# Altium PCB PCB1.PcbDoc
Units mil, origin at the board's own origin, x right, y up, seen from the top; angles counter-clockwise.
Board outline 4028 x 3940 mil, 2 copper layers (Top Layer, Bottom Layer); 72 components, 54 nets, 230 pads, 31 vias.
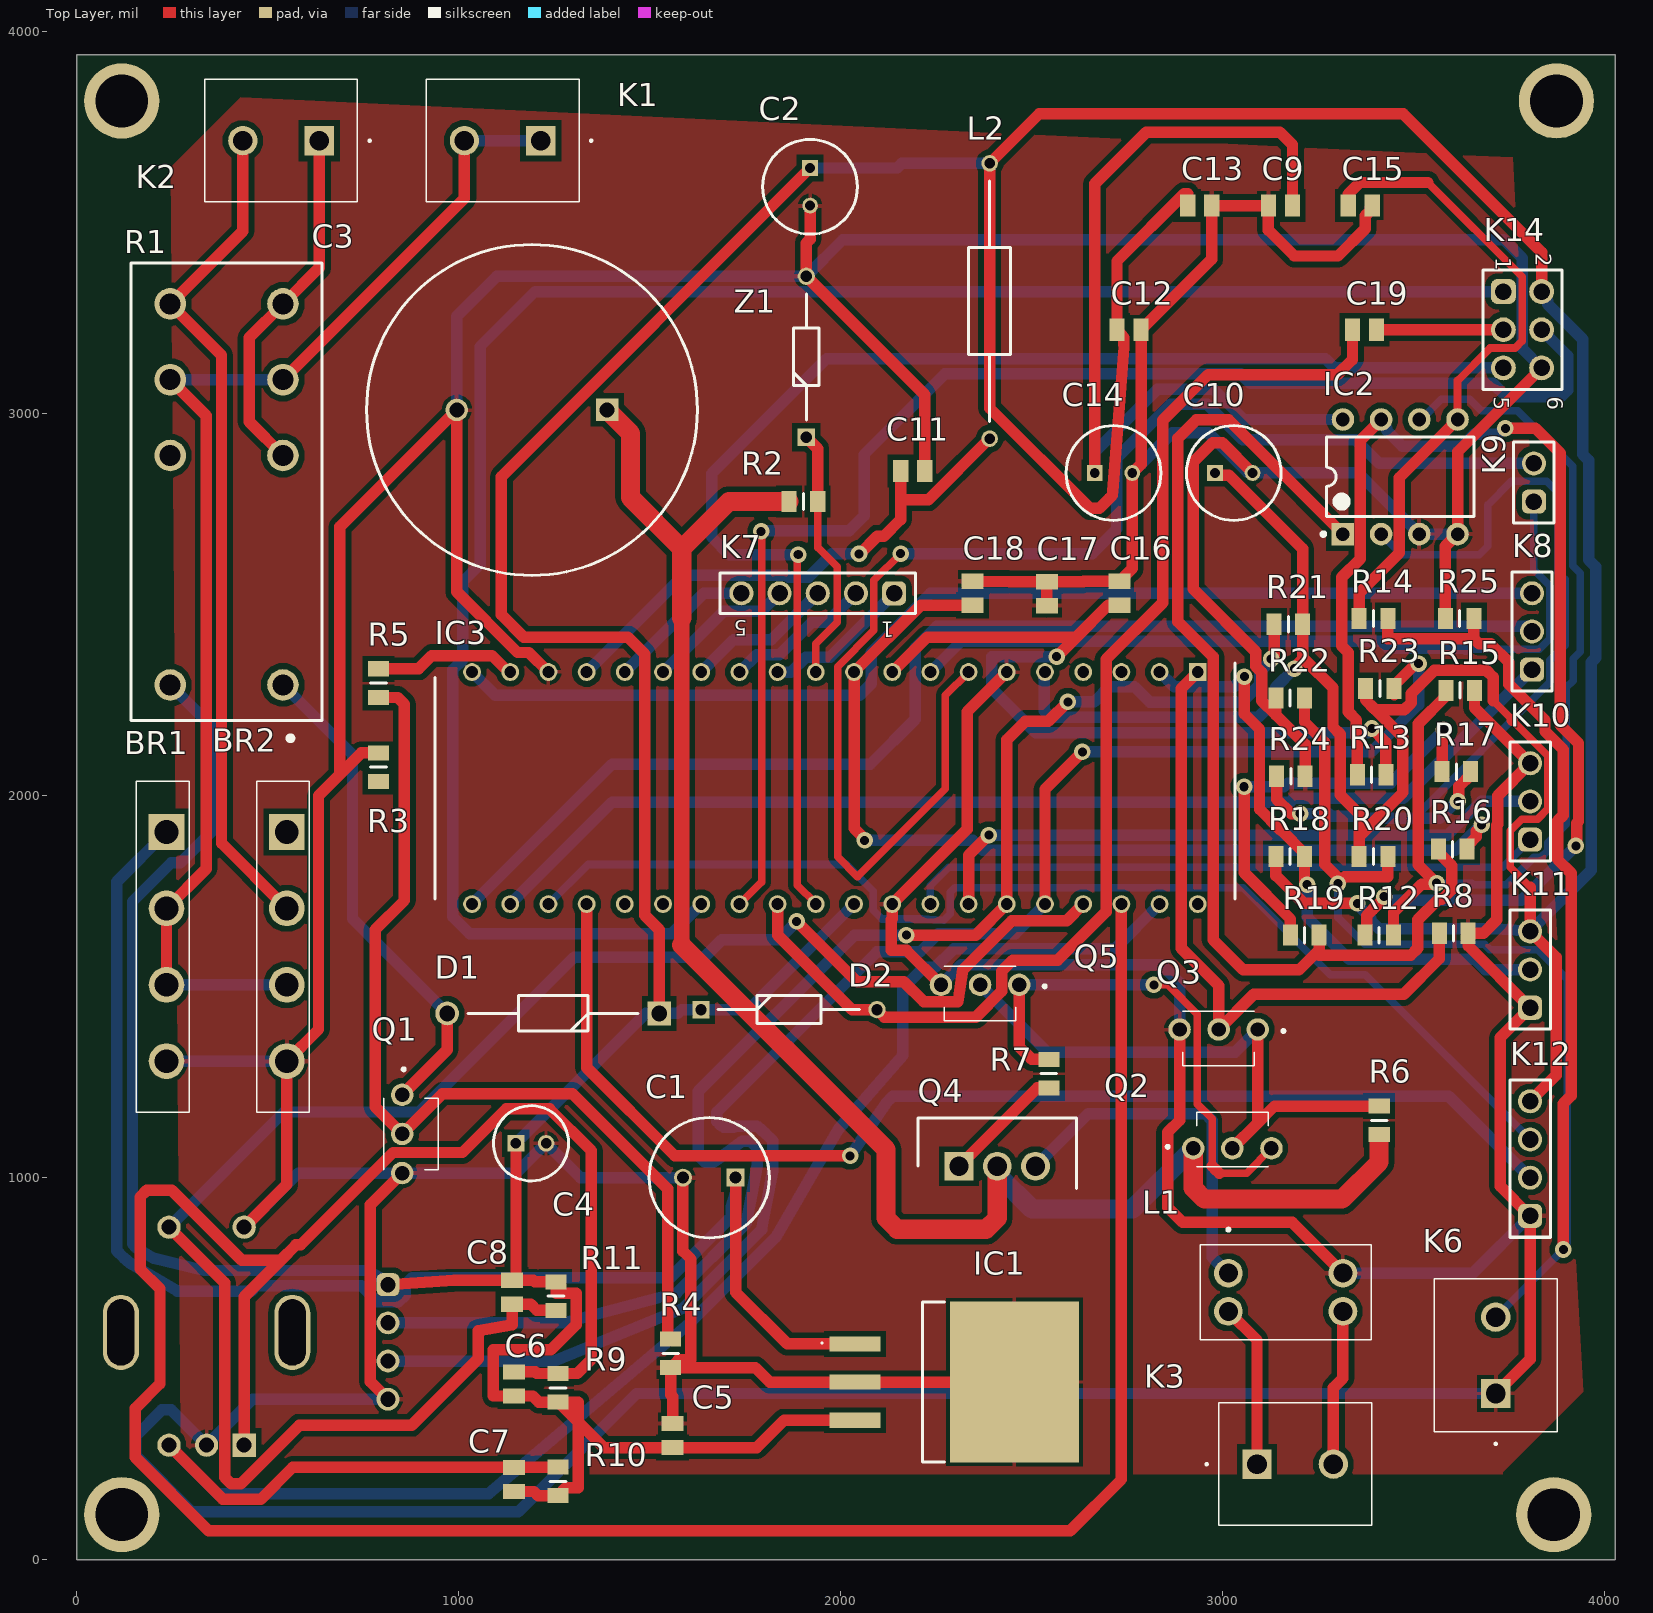
[diagram p0: Top Layer view]
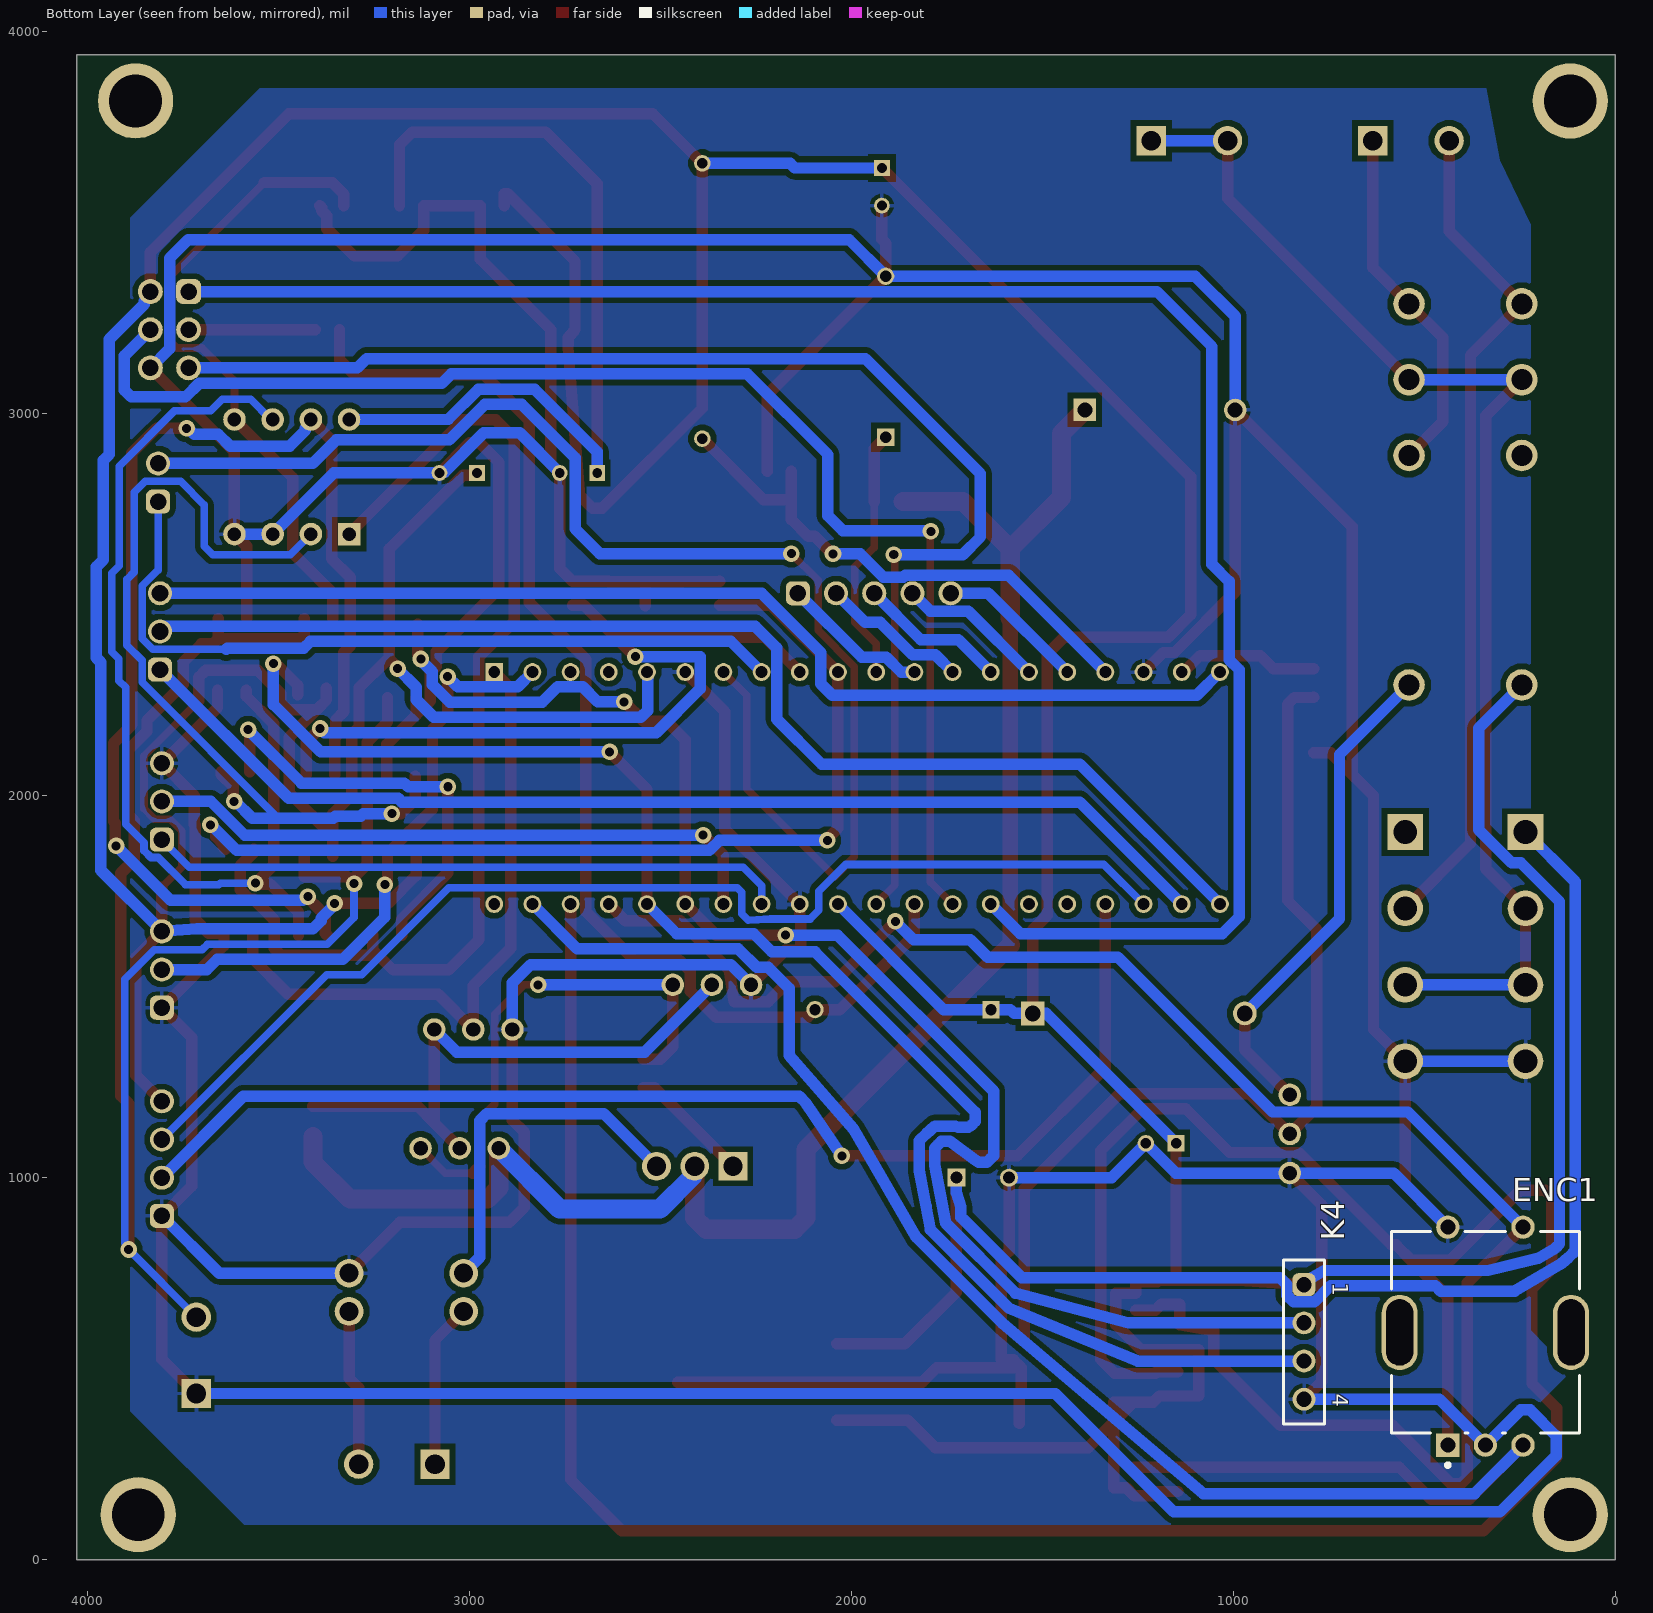
[diagram p1: Bottom Layer view, seen from below]
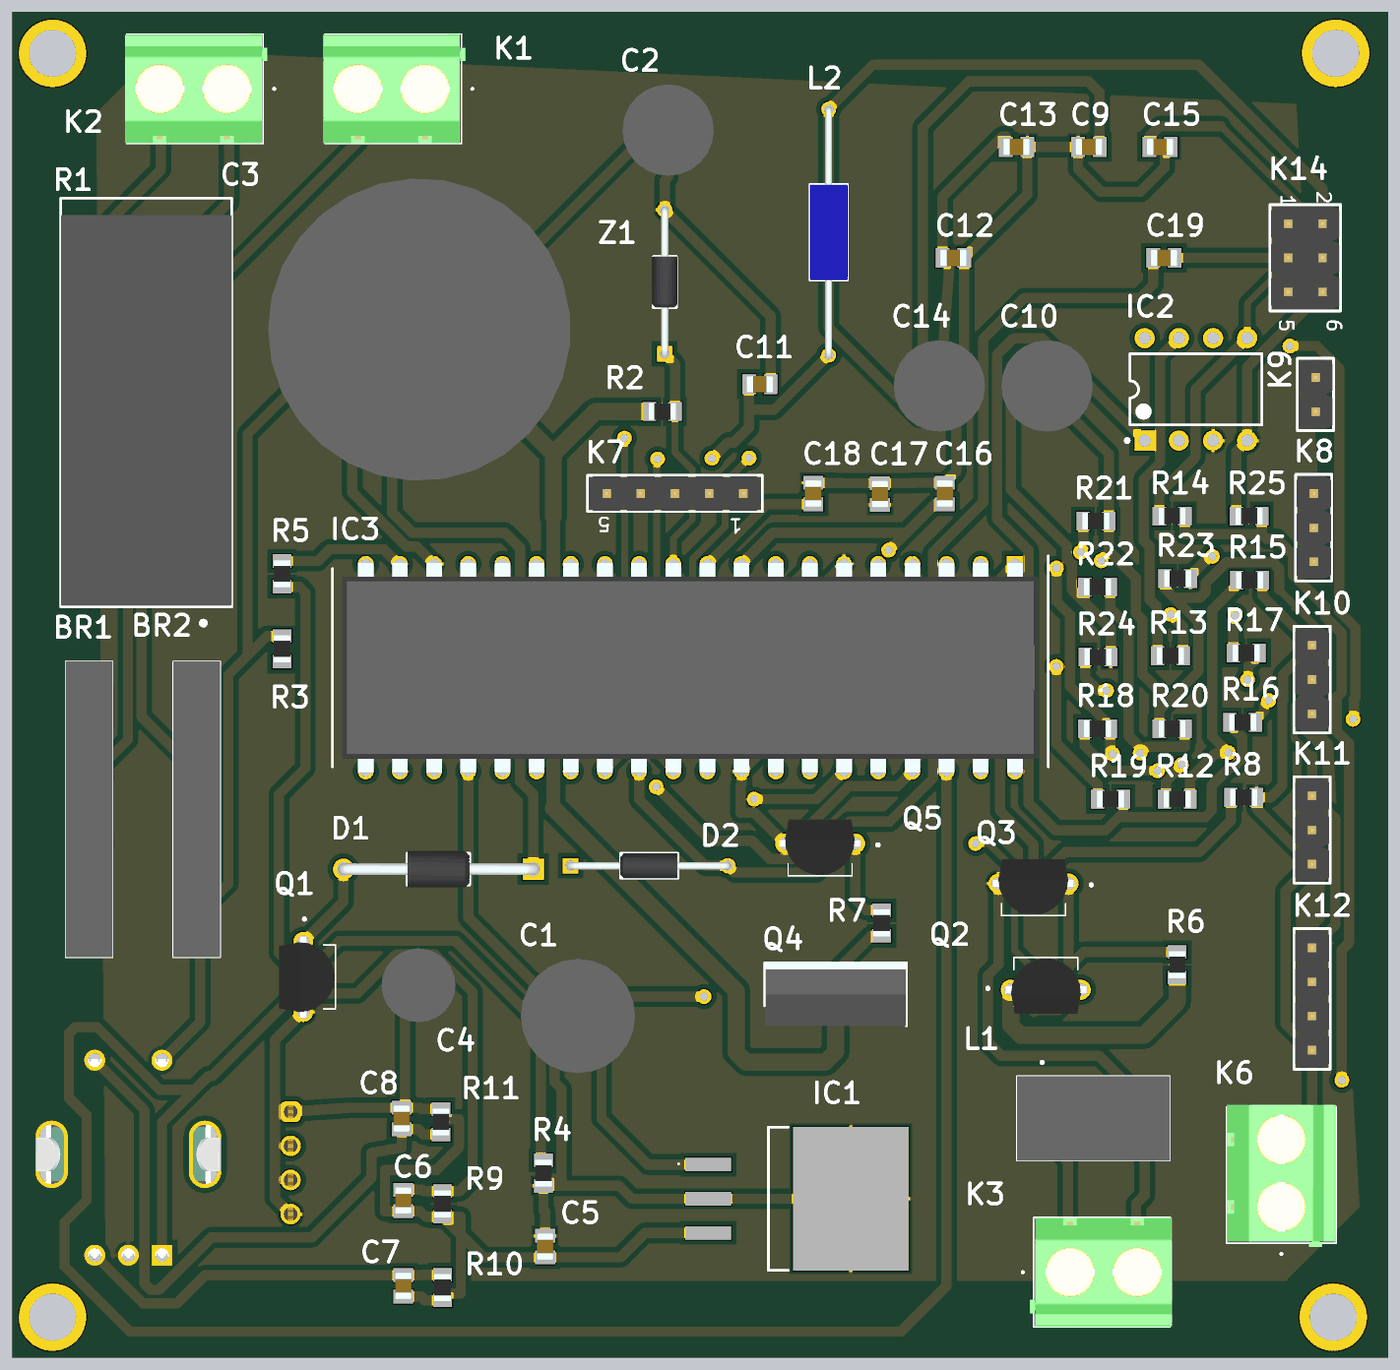
[diagram p2: 3D render of the assembled board from above, using the file's embedded part models]

## Layer stack, top to bottom
Top Solder: solder mask 0.4, Solder Resist, Dk 3.5
Top Layer: signal copper 1.4
Dielectric 1: dielectric 12.6, FR-4, Dk 4.8
Bottom Layer: signal copper 1.4
Bottom Solder: solder mask 0.4, Solder Resist, Dk 3.5

## Board outline
0,0 4028,0 4028,3940 0,3940

## Design rules (kind name [scope] priority, off if disabled: settings)
Clearance Clearance_4 [InNamedPolygon('GND_L02_P002')] p1: gap=15 ignorepadtopadclearanceinfootprint=FALSE
Clearance Clearance_3 [InNamedPolygon('GND_L01_P000')] p2: gap=15 ignorepadtopadclearanceinfootprint=FALSE
Clearance Clearance_2 [InNamedPolygon('GND_L01_P004')] p3: gap=20 ignorepadtopadclearanceinfootprint=FALSE
Clearance Clearance_1 [InNamedPolygon('GND_L02_P002')] p4: gap=20 ignorepadtopadclearanceinfootprint=FALSE
Clearance [All] p5: gap=0.25 ignorepadtopadclearanceinfootprint=FALSE except(0: Arc-Hole Track-Hole SMDPad-Hole THPad-Hole Via-Hole Fill-Hole Poly-Hole Region-Hole Text-Hole; 10: Arc-Arc Arc-Track Arc-SMDPad Track-Track Track-SMDPad SMDPad-SMDPad)
HoleSize [All] p1: absolutevalues=TRUE maxlimit=200 minlimit=1 maxpercent=80.000 minpercent=20.000
PolygonConnect [All] p1: connectstyle=Relief reliefconductorwidth=10 reliefentries=4 polygonreliefangle="90 Angle" airgapwidth=10
RoutingVias [All] p1: holewidth=23.62 width=43.31 viastyle="Through Hole" minholewidth=23.62 minwidth=43.31 maxholewidth=23.62 maxwidth=43.31
SolderMaskExpansion [All] p1: expansion=4 istentingtop=FALSE
Width [All] p1: maxlimit=50 minlimit=20 preferedwidth=20 minimp=50.000000 maximp=50.000000 favimp=50.000000
29 further rules are at their usual default settings.

## Classes and differential pairs
component class VoedingSCH: BR1 BR2 C1 C2 C3 D1 IC1 K1 K2 Q1 R1 R2 R3 R4 R5 Z1
component class Soldeerboute: K3 L1 Q2 Q3 Q4 Q5 R6 R7 R8
component class MainBoard: C9 C10 C11 C12 C13 C14 C15 C16 C17 C18 C19 D2 IC2 IC3 K6 K7 K8 K9 K10 K11 K12 K14 L2 R12 R13 R14 R15 R16 R17 R18 R19 R20 R21 R22 R23 R24 R25
component class Display: C4 C5 C6 C7 C8 ENC1 K4 R9 R10 R11

## Components (designator, comment, footprint, x,y, rotation, side; value= is the part's Value field where it differs from the comment)
BR1 "GBU6J" GBU6J 235,1905 r90 top
BR2 "GBU6J" GBU6J 550,1905 r90 top
C1 "100uF" CAPPRD350W60D800H1250 1725,1000 r180 top
C2 "10uF" CAPPRD250W45D630H850 1920,3643.43 r270 top
C3 "4700 uF" CAPPRD1000W80D2200H3700 1388.7,3010 r180 top
C4 "0.1 uF capaciteit" CAPPRD200W52D500H1250 1150,1090 r0 top
C5 "100n" CAPC2012X88N 1560,325 r90 top
C6 "10n" CAPC2012X88N 1145,460 r270 top
C7 "10n" CAPC2012X88N 1145,210 r270 top
C8 "10n" CAPC2012X88N 1140,700 r90 top
C9 "100n" CAPC2012X88N 3151.5,3545 r180 top
C10 "10uF" CAPPRD250W45D630H850 2980,2845 r0 top
C11 "100n" CAPC2012X88N 2188.5,2850 r180 top
C12 "100n" CAPC2012X88N 2755,3220 r180 top
C13 "100n" CAPC2012X88N 2940,3545 r180 top
C14 "10uF" CAPPRD250W45D630H850 2665,2845 r0 top
C15 "10n" CAPC2012X88N 3360,3545 r180 top
C16 "10n" CAPC2012X88N 2730,2530 r270 top
C17 "10n" CAPC2012X88N 2540,2528.5 r270 top
C18 "10n" CAPC2012X88N 2345,2530 r270 top
C19 "100n" CAPC2012X88N 3371.5,3220 r180 top
D1 "1N4007-T" DIOAD1408W86L464D236 1525,1430 r180 top
D2 "1N4148" DIOAD1165W56L425D185 1634.37,1440 r0 top
ENC1 "PEC11R-4215F-S0024" FP-PEC11R-4215F-S0024-MFG 340,595 r180 bottom
IC1 "R-78B5.0-1.5L" TL78005CKTTR 2303.23,465 r270 top
IC2 "MCP6002-E/P" PDIP300-P8 3465,2835 r90 top
IC3 "ATMEGA4809-PF" DIP1543W58P254L5175H635Q40N 1985,2020 r270 top
K1 "printkroonconnector" 1729128 1215,3715 r180 top
K2 "printkroonconnector" 1729128 635,3715 r180 top
K3 "printkroonconnector" 1729128 3090,250 r0 top
K4 "61300411821" 61300411821 815,570 r270 bottom
K6 "printkroonconnector" 1729128 3715,435 r90 top
K7 "61300511121" 61300511121 1940,2530 r180 top
K8 "61300311121" 61300311121 3810,2430 r90 top
K9 "61300211121" 61300211121 3815,2820 r90 top
K10 "61300311121" 61300311121 3805,1985 r90 top
K11 "61300311121" 61300311121 3805,1545 r90 top
K12 "61300411121" 61300411121 3805,1050 r90 top
K14 "61300621121" 61300621121 3785,3220 r270 top
L1 "CM2545X171B-10" CM2545X171B10 3015,750 r270 top
L2 "10uH" INDAD1827W51L711D279 2390,2935 r90 top
Q1 "BC547BTF" BC33740TA 875,1150 r270 top
Q2 "BC547BTF" BC33740TA 2990,1100 r0 top
Q3 "BC547BTF" BC33740TA 3025,1365 r180 top
Q4 "IRF9Z34NPBF" TO254P469X1042X1967-3P 2310,1030 r0 top
Q5 "BC547BTF" BC33740TA 2400.43,1481.97 r180 top
R1 "RT424005" RT42 392.36,2290 r90 top
R2 "68K" RESC2012X65N 1902.6,2770 r180 top
R3 "10K" RESC2012X65N 790,2075 r270 top
R4 "4k7" RESC2012X65N 1555,540 r90 top
R5 "10K" RESC2012X65N 790,2295 r270 top
R6 "4k7" RESC2012X65N 3410,1150 r270 top
R7 "100" RESC2012X65N 2545,1272.4 r270 top
R8 "4k7" RESC2012X65N 3605,1640 r0 top
R9 "10K" RESC2012X65N 1260,450 r270 top
R10 "10K" RESC2012X65N 1260,205 r270 top
R11 "10K" RESC2012X65N 1255,690 r90 top
R12 "18k" RESC2012X65N 3410,1635 r180 top
R13 "5k6" RESC2012X65N 3390,2055 r180 top
R14 "5k6" RESC2012X65N 3395,2464 r180 top
R15 "100" RESC2012X65N 3622,2276 r180 top
R16 "5K6" RESC2012X65N 3602,1860 r180 top
R17 "18k" RESC2012X65N 3612,2063 r0 top
R18 "4k7" RESC2012X65N 3177,1841 r0 top
R19 "18k" RESC2012X65N 3215,1635 r0 top
R20 "1M" RESC2012X65N 3395,1841 r0 top
R21 "4k7" RESC2012X65N 3172,2449 r180 top
R22 "5k6" RESC2012X65N 3177,2256 r180 top
R23 "4k7" RESC2012X65N 3411.6,2281 r0 top
R24 "100" RESC2012X65N 3178.6,2051 r180 top
R25 "10M" RESC2012X65N 3620.4,2464 r180 top
Z1 "5V1" DIOAD1068W53L380D172 1910,2938.74 r90 top

## Footprints (in the part's own frame and the unit in brackets; to place one, negate y for a bottom-side part, rotate by r counter-clockwise, add the part's x,y. Pads: shape width x height; smd on the part's side, far side on the other; paste and mask are expansions set on the pad)
1729128 [mm]
  rect 1.95x1.95 hole 1.3: 1(0,0)
  round 1.95 hole 1.3: 2(5.08,0)
  silkscreen extent -3.4,-4.08 7.62,4.08, body extent -2.82,-4.05 7.74,4.05, height 10.32
61300211121 [mm] "Pin Header, pitch 2.54 mm, THT, Vertical, single row, 2p"
  rrect50% 1.6x1.6 hole 1.1: 1(-1.27,0)
  round 1.6 hole 1.1: 2(1.27,0)
  silkscreen extent -2.69,-1.34 2.69,1.34, body extent -2.54,-1.27 2.54,1.27, height 8.57
61300311121 [mm] "Pin Header, pitch 2.54 mm, THT, Vertical, single row, 3p"
  rrect50% 1.6x1.6 hole 1.1: 1(-2.54,0)
  round 1.6 hole 1.1: 2(0,0) 3(2.54,0)
  silkscreen extent -3.96,-1.34 3.96,1.34, body extent -3.81,-1.27 3.81,1.27, height 8.57
61300411121 [mm] "Pin Header, pitch 2.54 mm, THT, Vertical, single row, 4p"
  rrect50% 1.6x1.6 hole 1.1: 1(-3.81,0)
  round 1.6 hole 1.1: 2(-1.27,0) 3(1.27,0) 4(3.81,0)
  silkscreen extent -5.23,-1.34 5.23,1.34, body extent -5.08,-1.27 5.08,1.27, height 8.57
61300411821 [mm] "Socket Header, Pitch 2.54 mm, THT, Vertical, single row, 4p"
  rrect50% 1.52x1.52 hole 1.02: 1(-3.81,0)
  round 1.52 hole 1.02: 2(-1.27,0) 3(1.27,0) 4(3.81,0)
  silkscreen extent -5.46,-1.35 5.46,1.35, body extent -5.33,-1.25 5.33,1.25, height 8.55
61300511121 [mm] "Pin Header, pitch 2.54 mm, THT, Vertical, single row, 5p"
  rrect50% 1.6x1.6 hole 1.1: 1(-5.08,0)
  round 1.6 hole 1.1: 2(-2.54,0) 3(0,0) 4(2.54,0) 5(5.08,0)
  silkscreen extent -6.5,-1.34 6.5,1.34, body extent -6.35,-1.27 6.35,1.27, height 8.57
61300621121 [mm] "Pin Header, pitch 2.54 mm, THT, Vertical, dual row, 6p"
  rrect50% 1.65x1.65 hole 1.1: 1(-2.54,-1.27)
  round 1.65 hole 1.1: 2(-2.54,1.27) 3(0,-1.27) 4(0,1.27) 5(2.54,-1.27) 6(2.54,1.27)
  silkscreen extent -3.96,-2.61 3.96,2.61, body extent -3.81,-2.54 3.81,2.54, height 8.59
BC33740TA [mm]
  round 1.493 hole 0.96: 1(-1.7,-0.585) 2(0.9,-0.585) 3(3.5,-0.585)
  silkscreen extent -3.5,-1.81 3.28,1.81, body extent -2.16,-2.38 4,1.75, height 8.67
CAPC2012X88N [mm]
  rect 1.02x1.47 smd: 1(-0.8,0) 2(0.8,0)
  body extent -1,-0.63 1,0.63, height 0.88
CAPPRD200W52D500H1250 [mm]
  rect 1.1x1.1 hole 0.7: 1(0,0)
  round 1.1 hole 0.7: 2(2,0)
  silkscreen extent -1.5,-2.5 3.5,2.5, body extent -1.75,-2.75 3.75,2.75, height 12.5
CAPPRD250W45D630H850 [mm]
  rect 1.05x1.05 hole 0.65: 1(0,0)
  round 1.05 hole 0.65: 2(2.5,0)
  silkscreen extent -1.9,-3.15 4.4,3.15, body extent -2.15,-3.4 4.65,3.4, height 8.5
CAPPRD350W60D800H1250 [mm]
  rect 1.2x1.2 hole 0.8: 1(0,0)
  round 1.2 hole 0.8: 2(3.5,0)
  silkscreen extent -2.25,-4 5.75,4, body extent -2.5,-4.25 6,4.25, height 12.5
CAPPRD1000W80D2200H3700 [mm]
  rect 1.5x1.5 hole 1: 1(0,0)
  round 1.5 hole 1: 2(10,0)
  silkscreen extent -6,-11 16,11, body extent -6.25,-11.25 16.25,11.25, height 37
CM2545X171B10 [mil]
  round 75 hole 50: 1(0,0) 2(100,0) 3(100,300) 4(0,300)
  silkscreen extent -118,-74 174,374, body extent -74,-74 174,374, height 378
DIOAD1068W53L380D172 [mm]
  rect 1.15x1.15 hole 0.75: 1(0,0)
  round 1.15 hole 0.75: 2(10.7,0)
  silkscreen extent 1.14,-0.86 9.52,0.86, body extent -0.26,-0.95 10.95,0.95, height 1.9
DIOAD1165W56L425D185 [mm]
  rect 1.15x1.15 hole 0.75: 1(0,0)
  round 1.15 hole 0.75: 2(11.7,0)
  silkscreen extent 1.14,-0.93 10.54,0.93, body extent -0.28,-0.92 11.93,0.92, height 1.84
DIOAD1408W86L464D236 [mm]
  rect 1.575x1.575 hole 1.05: 1(0,0)
  round 1.575 hole 1.05: 2(14.1,0)
  silkscreen extent 1.4,-1.18 12.7,1.18, body extent -0.43,-1.36 14.51,1.36, height 2.71
DIP1543W58P254L5175H635Q40N [mm]
  rect 1.184x1.184 hole 0.784: 1(-7.715,24.13)
  round 1.184 hole 0.784: 2(-7.715,21.59) 3(-7.715,19.05) 4(-7.715,16.51) 5(-7.715,13.97) 6(-7.715,11.43) 7(-7.715,8.89) 8(-7.715,6.35) 9(-7.715,3.81) 10(-7.715,1.27) 11(-7.715,-1.27) 12(-7.715,-3.81) 13(-7.715,-6.35) 14(-7.715,-8.89) 15(-7.715,-11.43) 16(-7.715,-13.97) 17(-7.715,-16.51) 18(-7.715,-19.05) 19(-7.715,-21.59) 20(-7.715,-24.13) 21(7.715,-24.13) 22(7.715,-21.59) 23(7.715,-19.05) 24(7.715,-16.51) 25(7.715,-13.97) 26(7.715,-11.43) 27(7.715,-8.89) 28(7.715,-6.35) 29(7.715,-3.81) 30(7.715,-1.27) 31(7.715,1.27) 32(7.715,3.81) 33(7.715,6.35) 34(7.715,8.89) 35(7.715,11.43) 36(7.715,13.97) 37(7.715,16.51) 38(7.715,19.05) 39(7.715,21.59) 40(7.715,24.13)
  silkscreen extent -8.31,-26.61 7.37,26.61, body extent -7.86,-25.88 7.86,25.88, height 6.35
FP-PEC11R-4215F-S0024-MFG [mm]
  round 1.55 hole 1 paste-1000 mask+0: 1(-2.5,7) 2(2.5,7) B(2.5,-7.5) C(0,-7.5)
  rrect100% 2.4x5 hole 4.4 slot 1.8 at 0 deg paste-1000 mask+0: 3(-5.7,0) 4(5.7,0)
  rect 1.55x1.55 hole 1 paste-1000 mask+0: A(-2.5,-7.5)
  silkscreen extent -6.25,-8.95 6.25,6.7, body extent -6.9,-7.8 6.9,7.12, height 21.5
GBU6J [mm]
  rect 2.37x2.37 hole 1.58: 1(0,0)
  round 2.37 hole 1.58: 2(-5.08,0) 3(-10.16,0) 4(-15.24,0)
  silkscreen extent -18.62,-1.5 3.38,2, body extent -18.62,-1.5 3.38,2, height 18.9
INDAD1827W51L711D279 [mm]
  round 1.1 hole 0.7: 1(0,0) 2(18.3,0)
  silkscreen extent 1.14,-1.4 17.14,1.4, body extent -0.25,-1.39 18.53,1.39, height 2.78
PDIP300-P8 [mm] "8-Pin Plastic Dual In-Line Package (PDIP)"
  rect 1.5x1.5 hole 0.9: 1(-3.81,3.81)
  round 1.5 hole 0.9: 2(-3.81,1.27) 3(-3.81,-1.27) 4(-3.81,-3.81) 5(3.81,-3.81) 6(3.81,-1.27) 7(3.81,1.27) 8(3.81,3.81)
  silkscreen extent -3.93,-4.9 2.65,5.23, body extent -3.55,-4.9 3.55,4.9, height 4.32
RESC2012X65N [mm]
  rect 1x1.4 smd: 1(-0.95,0) 2(0.95,0)
  silkscreen extent 0,-0.53 0,0.53, body extent -1,-0.63 1,0.63, height 0.65
RT42 [mm]
  round 2.1 hole 1.4: 1(0,-3.75) 2(15.26,-3.75) 3(20.3,-3.75) 4(25.34,-3.75) 5(25.34,3.75) 6(20.3,3.75) 7(15.26,3.75) 8(0,3.75)
  silkscreen extent -3.67,-6.35 28.07,6.35, body extent -2.21,-6.35 26.79,6.35, height 15.86
TL78005CKTTR [mm]
  rect 1x3.4 smd: 1(-2.54,-6.745) 2(0,-6.745) 3(2.54,-6.745)
  rect 10.7x8.6 smd: 4(0,3.855)
  silkscreen extent -5.33,-9 5.33,-0.8
TO254P469X1042X1967-3P [mm]
  rect 1.92x1.92 hole 1.28: 1(0,0)
  round 1.92 hole 1.28: 2(2.54,0) 3(5.08,0)
  silkscreen extent -2.73,-1.49 7.81,3.2, body extent -2.67,-1.5 7.75,3.19, height 18.84

## Part data
BR1 BR2: "Bridge Rectifier", Manufacturer_Name="GeneSiC Semiconductor", Datasheet Link=https://www.diodemodule.com/silicon_products/bridge_rectifiers/gbu6j.pdf, Height=18.8mm, Manufacturer_Part_Number=GBU6J
C1: library part ESK107M050AG3EA, "Capacitor Polarised", Manufacturer_Name=Kemet, Height=12.5mm, Manufacturer_Part_Number=ESK107M050AG3EA
C2 C10 C14: library part "10uF Capaciteit", "Capacitor Polarised", Manufacturer_Name=Kemet, Manufacturer_Part_Number=ESS106M050AE2AA, Datasheet Link=https://content.kemet.com/datasheets/KEM_A4057_ESS.pdf, Height=8.5mm
C3: library part "4700 uF capaciteit", "Capacitor Polarised", Manufacturer_Name=Kemet, Manufacturer_Part_Number=ESK478M050AQ3AA, Mouser2 Part Number=80-ESK478M050AQ3AA, Datasheet Link=https://componentsearchengine.com//ESK478M050AQ3AA.pdf, Height=37mm, Mouser2 Price/Stock=https://www.mouser.com/Search/Refine.aspx?Keyword=80-ESK478M050AQ3AA
C4: "Capacitor Polarised", Manufacturer_Name="Wurth Elektronik", Manufacturer_Part_Number=860010672001, Datasheet Link=http://katalog.we-online.com/pbs/datasheet/860010672001.pdf, Height=12.5mm
C5 C6 C7 C8: library part C0805C103K5RACTU, "Capacitor", Manufacturer_Name=Kemet, Datasheet Link=https://ms.componentsearchengine.com/Datasheets/2/C0805C103K5RACTU.pdf, Height=0.88mm, Manufacturer_Part_Number=C0805C103K5RACTU
C9 C11 C12 C13 C15 C16 C17 C18 C19: library part "0805 SMD capaciteit", "Capacitor", Manufacturer_Name=Kemet, Manufacturer_Part_Number=C0805C103K5RACTU, Datasheet Link=https://ms.componentsearchengine.com/Datasheets/2/C0805C103K5RACTU.pdf, Height=0.88mm
D1: "Diode", Manufacturer_Name=Rectron, Mouser2 Part Number=583-1N4007-T, Datasheet Link=https://componentsearchengine.com//1N4007-T.pdf, Manufacturer_Part_Number=1N4007-T, Mouser2 Price/Stock=https://www.mouser.com/Search/Refine.aspx?Keyword=583-1N4007-T
D2: "Diode", Manufacturer_Name=Nexperia, Datasheet Link=https://datasheet.datasheetarchive.com/originals/distributors/Datasheets-112/DSAP0040891.pdf, Manufacturer_Part_Number=1N4148
ENC1: library part CMP-1747-00012-2, "ROTARY ENCODER MECHANICAL 24PPR", Max Operating Temperature=70°C, Min Operating Temperature=-30°C, Package Quantity=150, Built in Switch=Yes, Detent=Yes, Encoder Type=Mechanical, Height=13.4mm, Hole Diameter=1.8mm, Length=21.5mm, Mount="Through Hole", Number of Channels=2, Orientation=Vertical, Output Type=Quadrature, Packaging=Bulk, Pulses per Revolution=24, Radiation Hardening=No, REACH SVHC="No SVHC", RoHS Compliant=Yes, Series=PEC11R, Termination="PC Pins", Type=Mechanical, Width=12.5mm
IC1: library part TL780-05CKTTR, "Integrated Circuit", Manufacturer_Name="Texas Instruments", Datasheet Link=http://www.ti.com/general/docs/suppproductinfo.tsp?distId=26&gotoUrl=http%3A%2F%2Fwww.ti.com%2Flit%2Fgpn%2Ftl780, Height=5.08mm, Manufacturer_Part_Number=TL780-05CKTTR
IC2: library part CMP-0187-00133-3, "None", Case/Package=PDIP, Input Bias Current=1pA, Input Offset Voltage (Vos)=4.5mV, Max Operating Temperature=125°C, Max Supply Voltage=6V, Min Operating Temperature=-40°C, Min Supply Voltage=1.8V, Nominal Supply Current=100uA, Operating Supply Voltage=5.5V, Output Current=23mA, Package Quantity=60, Power Supply Rejection Ratio (PSRR)=86dB, Voltage Gain=112dB, Amplifier Type="GENERAL PURPOSE", Bandwidth=1MHz, Common Mode Rejection Ratio=60dB, Gain Bandwidth Product=1MHz, Height=3.3mm, Input Offset Voltage-Max=4.5mV, Lead Free="Lead Free", Length=9.27mm, Mount="Through Hole", Number of Amplifiers=2, Number of Channels=2, Number of Circuits=2, Number of Elements=2, Number of Pins=8, Operating Supply Current=100uA, Output Current per Channel=23mA, Packaging=Rail/Tube, Radiation Hardening=No, REACH SVHC="No SVHC", RoHS Compliant=Yes, Slew Rate=0.6V/µs, Slew Rate-Nom=0.6V/µs, Supply Current=100uA, Technology=CMOS, Unity Gain Bandwidth Product=1MHz, Width=6.35mm
IC3: "Integrated Circuit", Manufacturer_Name=Microchip, Mouser2 Part Number=556-ATMEGA4809-PF, Datasheet Link=https://componentsearchengine.com//ATMEGA4809-PF.pdf, Height=6.35mm, Manufacturer_Part_Number=ATMEGA4809-PF, Mouser2 Price/Stock=https://www.mouser.com/Search/Refine.aspx?Keyword=556-ATMEGA4809-PF
K1 K2 K3 K6: "Connector", Manufacturer_Name="Phoenix Contact", Manufacturer_Part_Number=1729128, Datasheet Link=http://www.phoenixcontact.com/de/produkte/1729128/pdf, Height=10.15mm
K4: "WR-PHD Socket Header, THT, pitch 2.54mm, Single Row, Vertical, 4p", Contact Resistance=20mOhm, Manufacturer="Wurth Elektronik", Operating Temperature="-40 to +125degC", Rated Current=3A, Withstanding Voltage=500VAC, Working Voltage=250VAC, ComponentLink1Description=Manufacturer, ComponentLink1URL=http://www.we-online.de, ComponentLink2Description=Datasheet, ComponentLink2URL=https://www.we-online.com/catalog/datasheet/61300411821.pdf, Gender="Socket Header", Manufacturer Part Number=61300411821, Mounting Technology=THT, Orientation=Vertical, Packaging=Tray, Pin Number=4, Pitch=2.54mm, Row Number=Single
K7: "WR-PHD Pin Header, THT, pitch 2.54mm, Single Row, Vertical, 5p", Contact Resistance=20mOhm, Manufacturer="Wurth Elektronik", Operating Temperature="-40 to +105degC", Rated Current=3A, Withstanding Voltage=500VAC, Working Voltage=250VAC, ComponentLink1Description=Manufacturer, ComponentLink1URL=http://www.we-online.de, ComponentLink2Description=Datasheet, ComponentLink2URL=https://www.we-online.com/catalog/datasheet/61300511121.pdf, Gender="Pin Header", Manufacturer Part Number=61300511121, Mounting Technology=THT, Orientation=Vertical, Packaging=Bag, Pin Number=5, Pitch=2.54mm, Row Number=Single
K8 K10 K11: "WR-PHD Pin Header, THT, pitch 2.54mm, Single Row, Vertical, 3p", Contact Resistance=20mOhm, Manufacturer="Wurth Elektronik", Operating Temperature="-40 to +105degC", Rated Current=3A, Withstanding Voltage=500VAC, Working Voltage=250VAC, ComponentLink1Description=Manufacturer, ComponentLink1URL=http://www.we-online.de, ComponentLink2Description=Datasheet, ComponentLink2URL=https://www.we-online.com/catalog/datasheet/61300311121.pdf, Gender="Pin Header", Manufacturer Part Number=61300311121, Mounting Technology=THT, Orientation=Vertical, Packaging=Bag, Pin Number=3, Pitch=2.54mm, Row Number=Single
K9: "WR-PHD Pin Header, THT, pitch 2.54mm, Single Row, Vertical, 2p", Contact Resistance=20mOhm, Manufacturer="Wurth Elektronik", Operating Temperature="-40 to +105degC", Rated Current=3A, Withstanding Voltage=500VAC, Working Voltage=250VAC, ComponentLink1Description=Manufacturer, ComponentLink1URL=http://www.we-online.de, ComponentLink2Description=Datasheet, ComponentLink2URL=https://www.we-online.com/catalog/datasheet/61300211121.pdf, Gender="Pin Header", Manufacturer Part Number=61300211121, Mounting Technology=THT, Orientation=Vertical, Packaging=Bag, Pin Number=2, Pitch=2.54mm, Row Number=Single
K12: "WR-PHD Pin Header, THT, pitch 2.54mm, Single Row, Vertical, 4p", Contact Resistance=20mOhm, Manufacturer="Wurth Elektronik", Operating Temperature="-40 to +105degC", Rated Current=3A, Withstanding Voltage=500VAC, Working Voltage=250VAC, ComponentLink1Description=Manufacturer, ComponentLink1URL=http://www.we-online.de, ComponentLink2Description=Datasheet, ComponentLink2URL=https://www.we-online.com/catalog/datasheet/61300411121.pdf, Gender="Pin Header", Manufacturer Part Number=61300411121, Mounting Technology=THT, Orientation=Vertical, Packaging=Bag, Pin Number=4, Pitch=2.54mm, Row Number=Single
K14: "WR-PHD Pin Header, THT, pitch 2.54mm, Dual Row, Vertical, 6p", Contact Resistance=20mOhm, Manufacturer="Wurth Elektronik", Operating Temperature="-40 to +105degC", Rated Current=3A, Withstanding Voltage=500VAC, Working Voltage=250VAC, ComponentLink1Description=Manufacturer, ComponentLink1URL=http://www.we-online.de, ComponentLink2Description=Datasheet, ComponentLink2URL=https://www.we-online.com/catalog/datasheet/61300621121.pdf, Gender="Pin Header", Manufacturer Part Number=61300621121, Mounting Technology=THT, Orientation=Vertical, Packaging=Bag, Pin Number=6, Pitch=2.54mm, Row Number=Dual
L1: "Transformer", Manufacturer_Name="Laird Technologies", Datasheet Link=https://datasheet.datasheetarchive.com/originals/dk/DKDS-7/122753.pdf, Height=9.5mm, Manufacturer_Part_Number=CM2545X171B-10
L2: library part 78F100J-RC, "Inductor", Manufacturer_Name=Bourns, Mouser2 Part Number=542-78F100-RC, Datasheet Link=https://componentsearchengine.com//78F100J-RC.pdf, Manufacturer_Part_Number=78F100J-RC, Mouser2 Price/Stock=https://www.mouser.com/Search/Refine.aspx?Keyword=542-78F100-RC
Q1 Q2 Q3 Q5: "Transistor BJT NPN", Manufacturer_Name="ON Semiconductor", Datasheet Link=https://www.onsemi.com/pub/Collateral/BC550-D.pdf, Manufacturer_Part_Number=BC547BTF
Q4: "MOSFET (P-Channel)", Manufacturer_Name=Infineon, Mouser2 Part Number=942-IRF9Z34NPBF, Datasheet Link=https://componentsearchengine.com//IRF9Z34NPBF.pdf, Height=4.69mm, Manufacturer_Part_Number=IRF9Z34NPBF, Mouser2 Price/Stock=https://www.mouser.com/Search/Refine.aspx?Keyword=942-IRF9Z34NPBF
R1: "Relay or Contactor", Manufacturer_Name="TE Connectivity", Mouser2 Part Number=655-RT424005, Datasheet Link=https://componentsearchengine.com//RT424005.pdf, Manufacturer_Part_Number=RT424005, Mouser2 Price/Stock=https://www.mouser.com/Search/Refine.aspx?Keyword=655-RT424005
R2 R3 R4 R5 R6 R7 R8 R9 R10 R11 R12 R13 R14 R15 R16 R17 R18 R19 R20 R21 R22 R23 R24 R25: library part ESR10EZPJ183, "Resistor", Manufacturer_Name="ROHM Semiconductor", Datasheet Link=https://datasheet.datasheetarchive.com/originals/distributors/Datasheets_SAMA/30ccb516c688c96e56c83a00b77a93f4.pdf, Height=0.65mm, Manufacturer_Part_Number=ESR10EZPJ183
Z1: library part 1N5231B, "Zener Diode", Manufacturer_Name="ON Semiconductor", Manufacturer_Part_Number=1N5231B

## Free pads (board coordinates)
  round 196.85 hole 137.8: 6(118.11,3818.9) 7(3874,3819) 8(118.11,118.11) 9(3867,118)

## Via types
v1: diameter 43.31, hole 23.62, Top Layer to Bottom Layer, 31 vias

## Nets (pads, with @x,y where several pads share a name; then routed paths per layer and width w, separated by ;. In a path a pad name is that pad's centre, name@x,y a point inside that pad or via, vN(x,y) a via of type N, cw(c..) or ccw(c..) an arc to the next point about the centre after c; other vN are vias at no path point)
+5: C2.1 C4.1 C5.1 C6.2 C7.2 C8.2 C10.1 C12.2 C13.2 D1.1 D2.1 IC1.3 IC3.5 IC3.31 K4.1 K11.3 K12.4 K14.2 L2.2 R1.8 R9.2 R10.2 R11.2 R18.1 R20.1 R21.1 R23.1 | length 20170.4
  Top Layer w20: 3708,2248.75 3758.25,2198.5 ; 3758.25,2197.86 3851.75,2104.36 3851.75,1965.64 3824.36,1938.25 3782.91,1938.25 3753,1908.34 3753,1812.38 3805,1760.38
  Top Layer w30: K4.1 988.5,731.5 C8.2 C8.2@1150,731.5 ; C7.2 1197,178.5 1207.91,167.6 R10.2 1280.4,188 1313,188 1313,360.4 ; C4.1 C8.2@1150,731.5 ; D1.1 1525,1649 1487,1687 1487,2371 1443,2415 1170.58,2415 1112,2473.58 1112,2835.43 C2.1 ; IC1.3 1852,365 1780.5,293.5 C5.1 1379.9,293.5 1313,360.4 ; C13.2 2908.5,3576 2899.5,3576 2723.5,3400 C12.2 2734.24,3207.42 2741.42,3199 2741.42,3180.71 2741.85,3180.27 2741.85,3174.43 2711.95,2797.1 2711.08,2786.08 2703.26,2778.26 2677.43,2752.43 2652.57,2752.43 2390,3015 L2.2 2519.53,3785 3473,3785 3835,3423 K14.2 ; C10.1 2985.67,2839.33 3016.67,2839.33 3209.4,2646.6 3209.4,2362 ; R18.1 3139.6,1791.08 3212.23,1718.45 v1(3352.86,1718.45) ; v1(3188,2333) 3188,2336.6 3209.4,2358 3209.4,2362 ; R20.1 3357.6,1894.22 ; R23.1 3374.2,2250.82 3397.02,2228 3400.11,2224.91 ; 3708,2248.75 3708,2310.86 3690.3,2328.56 3554.56,2328.56 3493.69,2267.69 3493.69,2243.09 3475.51,2224.91 3400.11,2224.91 ; 3758.25,2197.86 3758.25,2198.5 ; K12.4 3873,1268 3873,1577 K11.3 3805,1760.38 ; C8.2@1150,731.5 1195,731.5 1199.09,727.4 R11.2 1255,697.28 1307.56,697.28 1307.56,615.47 1241.09,549 1091.06,549 1091.06,428.5 C6.2 1194,428.5 1209.91,412.6 R9.2 R9.2@1260.8,412.6 ; R9.2@1260.8,412.6 1313,412.6 1313,360.4 ; R9.2@1260.8,412.6 1313,360.4 ; 3209.4,2362 3217.7,2353.7 3289,2282.4 3289,2180 3307.91,2161.09 3307.91,2002 3357.6,1952.31 3357.6,1894.22 ; 3357.6,1894.22 3472.09,2008.71 3472.09,2152.93 3400.11,2224.91
  Bottom Layer w30: R1.8 358,2176.72 358,1911 271,1824 247,1824 146,1723 146,826.58 154.79,817.8 157.51,815.07 202,789 333.18,757 761.92,757 800.08,734.92 807.99,727.01 K4.1 ; C4.1 1490,1430 D1.1 1574,1430 1584,1440 D2.1 1758.74,1440 IC3.31 ; C2.1 2148,3643.43 2160.05,3655.47 L2.2 ; IC3.5 2533.56,2322.3 2533.56,2222.75 2551.14,2205.18 3093.18,2205.18 3139.32,2251.32 3139.32,2284.32 v1(3188,2333) ; v1(3352.86,1718.45) 3352.86,1714.85 3388.19,1679.52 3388.19,1672.71 3409.41,1651.5 3712.96,1651.5 K11.3 3965,1805 3965,2349.18 3976.75,2360.93 3976.75,2599.07 3958,2617.82 3958,2878.57 3943.06,2893.5 3943.06,3194.94 3851.29,3286.71 3851.29,3294.25 3835,3310.54 K14.2
GND: BR1.4 BR2.4 C1.2 C2.2 C3.2 C4.2 C5.2 C9.2 C10.2 C11.1 C12.1 C13.1 C14.2 C15.1 C16.1 C17.1 C17.2 C18.1 ENC1.1 ENC1.C IC1.2 IC1.4 IC2.3 IC2.4 IC3.6 IC3.18 IC3.32 K4.4 K6.1 K10.3 K11.1 K12.1 K14.6 L1.4 Q1.3 Q3.3 Q5.3 R3.1 R4.1 R8.2 R15.1 R22.2 R24.1 R25.2 Z1.2 | length 26621.1
  Top Layer w30: ENC1.1 550,982.16 BR2.4 633,1388 633,2000 689,2056 ; R3.1 745.4,2112.4 689,2056 ; K4.4 769,466 769,929.24 Q1.3 ; IC3.18 1183.74,2375 1154.01,2375 995,2534.01 C3.2 689,2704 689,2056 ; C5.2 1560,427 1555,432 R4.1 ; C1.2 1587,1000 1587,808 1608,787 1608,523 1575.4,523 R4.1 ; C2.2 1920,3457 1910,3447 Z1.2 2220,3050 C11.1 ; Q5.3 2172.64,1595 2131.91,1595 2131.91,1675 2135,1678.09 IC3.32 2331,1912.26 2331,2219.74 IC3.6 ; C18.1 2442.5,2560 C17.1 ; IC1.4 IC1.2 1814.6,465 1777,502.6 R4.1 ; C17.2 C17.1 ; Q3.3 2887.2,1149.94 2856,1118.74 2856,922.57 2895.57,883 3182,883 L1.4 ; C10.2 2998.85,2924.57 2974,2924.57 2923,2873.57 2923,2541.19 3087,2377.19 3087,2338.57 3102.02,2323.55 3102.02,2248.98 3139.6,2211.4 ; R22.2 3139.6,2211.4 ; R24.1 3216,2135 3139.6,2211.4 ; C15.1 3386.42,3539.92 3386.42,3531.06 3373.58,3518.23 3373.58,3484.58 3302,3413 3188,3413 3120,3481 C9.2 C13.1 2971.5,3405 C12.1 2786.5,2868.07 C14.2 2763.43,2594.92 C16.1 2636.5,2561.5 2635,2560 C17.1 ; R25.2 3583,2653 IC2.4 3615,2900 K14.6 ; R15.1 3659.4,2230.6 K10.3 3720,2000 3720,1924.84 3718,1922.84 3718,1675 3683,1640 R8.2 3642.4,1607.6 K11.1 3727,1367 3727,978 K12.1 3805,525 K6.1
  Bottom Layer w30: BR1.4 BR2.4 ; ENC1.1 580.04,1012.2 Q1.3 1150.94,1012.2 C4.2 1318.74,1000 C1.2 ; K4.4 460.28,420 ENC1.C 247.79,391.94 222.94,391.94 155,324 155,272 302,125 1155.96,125 1465.96,435 K6.1 ; C3.2 995,3255 1100,3360 Z1.2 2006,3456 3736,3456 3785,3407 3785,3170 K14.6 ; Q5.3 2315.64,1558 2839.47,1558 2887.2,1510.27 Q3.3 ; C14.2 2868.43,2950 2962.15,2950 3064.98,2847.17 3076.26,2847.17 C10.2 ; C10.2@3075.36,2845 3355,2845 IC2.3 IC2.4 ; L1.4 3655,750 K12.1
NetBR1_1: BR1.1 C1.1 IC1.1 | length 3696.2
  Top Layer w30: C1.1 1725,700 1860,565 IC1.1
  Bottom Layer w30: BR1.1 105,1775 105,818.68 105,808.57 122.57,791 140.94,775.07 263.43,703 275.86,703 457,703 471,717 745.35,717 787.52,674.82 842.48,674.82 860.18,692.52 860.18,720.43 877.75,738 1554,738 1704.33,888.33 1713,897 1713.11,922.68 1725,960.92 C1.1
NetBR1_2: BR1.2 BR1.3 BR2.3 K1.1 K1.2 R1.3 R1.6 | length 3299.2
  Top Layer w30: BR1.3 BR1.2 339,1809 339,2994.94 R1.6 ; R1.3 1015,3564.21 K1.2
  Bottom Layer w30: BR1.3 BR2.3 ; R1.6 R1.3 ; K1.2 K1.1
NetBR2_2: BR2.2 K2.2 R1.5 | length 2215.3
  Top Layer w30: K2.2 435,3477.91 R1.5 379,3153.36 379,1876 BR2.2
NetC6_1: C6.1 ENC1.A IC3.38 R9.1 | length 7716.7
  Top Layer w30: ENC1.A 438.43,688.43 534,784 ; C6.1 1200,491.5 1204.09,487.4 R9.1 1310.4,487.4 1347.56,524.56 1347.56,1070.44 1238,1180 1124,1180 1010,1066 828,1066 586,824 574,824 534,784 ; IC3.38 2735,210 2600.96,75.96 345.04,75.96 153,268 153,396 218,461 218,709 166,761 166,949.43 183.57,967 249,967 432,784 534,784
NetC7_1: C7.1 ENC1.B IC3.39 R10.1 | length 4532.3
  Top Layer w30: ENC1.B 382.91,158.38 482.13,158.38 565.25,241.5 C7.1 1202,241.5 1202.91,242.4 R10.1
  Bottom Layer w30: ENC1.B 368.3,173 1079.24,173 1603.71,618 1830.19,844.48 1994.45,1127.54 2163,1320.31 2163,1496 2218,1551 2247.91,1551 2295.91,1599 2717.74,1599 IC3.39
NetC8_1: C8.1 ENC1.2 IC3.37 R11.1 | length 4816.2
  Top Layer w30: ENC1.2 387,725.16 387,215.96 404.57,198.38 429.43,198.38 583.04,352 877,352 1051.06,526.06 1051.06,599.33 1140,615 C8.1 1189,668.5 1204.91,652.6 R11.1 ; v1(1885,1671) 2043,1513 2165.36,1513 2218,1460.36 2307,1460.36 2320,1544.69 2448.31,1673 2591.74,1673 IC3.37
  Bottom Layer w30: ENC1.2 542.98,1172 897,1172 1302,1577 1643,1577 1689,1623 1837,1623 v1(1885,1671)
NetC9_1: C9.1 C14.1 IC2.8 | length 2309.6
  Top Layer w30: C14.1 2665,3602 2800,3737 3150,3737 3182.99,3704.01 C9.1
  Bottom Layer w30: C14.1 2665,2900 2829.44,3064.44 2976.28,3064.44 3055.71,2985 IC2.8
NetC11_2: C11.2 IC3.17 L2.1 | length 1418
  Top Layer w30: v1(2048,2633) 2049.71,2633 2095.99,2679.28 2113.28,2679.28 2157.01,2723.01 2157.01,2775.99 ; C11.2 2157.01,2775.99 ; L2.1 2230,2775 2158,2775 2157.01,2775.99
  Bottom Layer w30: IC3.17 1588.01,2576.75 1859.36,2576.75 1864.11,2572 1915.89,2572 1976.89,2633 v1(2048,2633)
NetC15_2: C15.2 IC2.5 R14.2 | length 1710.2
  Top Layer w20: 3537.5,3605.5 3784,3359 3784,3190.57 3765.43,3172 3700,3172 3615,3087 IC2.5
  Top Layer w30: C15.2 3328.5,3575 3359.01,3605.5 3537.5,3605.5 ; R14.2 3357.6,2530.6 3463,2636 3463,2833 IC2.5
NetC16_2: C16.2 IC3.9 R13.1 | length 2176.3
  Top Layer w30: IC3.9 2226.26,2415 2616.5,2415 ; v1(2565.5,2364) 2616.5,2415 ; C16.2 2700,2498.5 2616.5,2415 ; v1(3391,2176) 3427.4,2139.6 R13.1
  Bottom Layer w30: v1(2565.5,2364) 2396,2364 2396,2280 2511,2165 3380,2165 v1(3391,2176)
NetC18_2: C18.2 IC3.10 R16.1 | length 2568.2
  Top Layer w30: v1(2063,1883) 2063,1886.6 2035,1914.6 IC3.10 2209.76,2498.5 C18.2 ; R16.1 3644.09,1864.69 3644.09,1872.56 3664.54,1893.01 3664.54,1906.94 3678,1920.4 v1(3678,1924)
  Bottom Layer w30: v1(2063,1883) 2345.43,1883 2371.43,1857 3609.54,1857 3676.54,1924 v1(3678,1924)
NetC19_1: C19.1 K14.3 | length 332
  Top Layer w30: C19.1 K14.3
NetC19_2: C19.2 D2.2 IC3.29 | length 3164.2
  Top Layer w30: IC3.29 1835,1635 2030,1440 D2.2 2114.64,1420.36 2353.82,1420.36 2422,1488.54 2422,1541 2450,1569 2568,1569 2695,1696 2695,2357 2843,2505 2843,2983 2962,3102 3300,3102 3340,3142 C19.2
NetD1_2: D1.2 Q1.1 R1.1 | length 1300
  Top Layer w30: Q1.1 969.88,1334.84 D1.2
  Bottom Layer w30: R1.1 722,2108 722,1677.88 D1.2
NetIC2_1: IC2.1 R16.2 R19.2 | length 2894.3
  Top Layer w30: R19.2 3252.4,1596.4 ; IC2.1 3016,2984 2931.01,2984 2883,2935.99 2883,2455.74 2975,2363.74 2975,1623 3054,1544 3200,1544 3252.4,1596.4 ; R16.2 3564.6,1852.13 3600,1816.72 3600,1754.43 3574.17,1728.6 3564.6,1728.6 3511,1675 3511,1601 3492,1582 3252.4,1582 3252.4,1596.4
NetIC2_2: IC2.2 R17.2 R24.2 | length 2330.9
  Top Layer w30: R24.2 3141.2,1991 3179.65,1952.55 3202.55,1952.55 v1(3203.09,1953.09) ; v1(3616,1985) 3618.55,1987.55 3618.55,2024.27 3649.4,2055.13 R17.2
  Bottom Layer w20: IC2.2 3469,2631 3672,2631 3694,2653 3694,2761 3756,2823 3849,2823 3877,2795 3877,2585.68 3896.75,2565.93 3896.75,2394.07 3856.75,2354.07 3856.75,2296.75 3501,1941
  Bottom Layer w30: v1(3203.09,1953.09) 3278.25,1953.09 3284.75,1946.59 3351.21,1946.59 3356.8,1941 3501,1941 3568.4,1941 3612.4,1985 v1(3616,1985)
NetIC2_6: IC2.6 R12.1 R15.2 | length 2636.2
  Top Layer w30: R12.1 3447.4,1695 3520.86,1768.45 3557.45,1768.45 v1(3560,1771) 3512.09,1818.91 3512.09,2188.44 3584.6,2260.95 R15.2
  Bottom Layer w20: IC2.6 3519.62,2985 3572.62,3038 3647.07,3038 3677.07,3008 3772,3008 3917,2863 3917,2602.25 3936.75,2582.5 3936.75,2377.5 3918,2358.75 3918,2301.43 3900,2283.43 3900,1925.57 3851.75,1877.32 3851.75,1856.41 3833.59,1838.25 3814.82,1838.25 3743.07,1766.5 3656.94,1766.5 3652.44,1771 v1(3560,1771)
NetIC2_7: IC2.7 R12.2 R13.2 | length 3279.9
  Top Layer w30: R13.2 3352.6,2150.71 3350.38,2152.93 3350.38,2198.31 3329,2219.69 3329,2375 3312,2392 3312,2572 3360,2620 3360,2930 IC2.7 ; R12.2 3377.28,1639.69 3377.28,1686.31 3392.86,1701.89 3392.86,1702.66 3422.6,1732.4 v1(3422.6,1736) ; v1(3740,2962) 3819,2962 3884,2897 3884,2185.25 3931.75,2137.5 3931.75,1932.5 3927.55,1928.29 3927.55,1871.55 v1(3925,1869)
  Bottom Layer w30: IC2.7 3415,2977.14 3429.53,2962.61 3429.53,2956.14 3470.67,2915 3626,2915 3657,2946 3720.4,2946 3736.4,2962 v1(3740,2962) ; v1(3422.6,1736) 3426.2,1736 3435.7,1726.5 3782.5,1726.5 v1(3925,1869)
NetIC3_1: IC3.1 Q3.2 R8.1 | length 1715.2
  Top Layer w30: IC3.1 2892,2280.74 2892,1600.57 2989.57,1503 Q3.2 3081.53,1480 3474,1480 3567.6,1573.6 R8.1
NetIC3_2: IC3.2 K11.2 R18.2 | length 1588.6
  Top Layer w30: v1(3057,2312) 3057,2214 3096.51,2174.49 3096.51,1965.06 3152.26,1909.31 3153.96,1909.31 3214.4,1848.87 3214.4,1773.6 v1(3221,1767)
  Bottom Layer w30: IC3.2 2873.56,2285.18 3030.18,2285.18 v1(3057,2312) ; v1(3221,1767) 3221,1682.31 3331.81,1571.5 3660.5,1571.5 3687,1545 K11.2
NetIC3_7: IC3.7 K9.2 | length 3584.8
  Top Layer w20: v1(2157,2634) 2087,2564 2087,2433 1992,2338 1992,1840 2044,1788 2274,2018 2274,2262.74 IC3.7
  Bottom Layer w30: v1(2157,2634) 2658.43,2634 2723.43,2699 2723.43,2885 2862.86,3024.44 2959.71,3024.44 3052.14,2932 3348,2932 3410,2870 K9.2
NetIC3_8: IC3.8 K9.1 | length 2051.6
  Bottom Layer w20: 3636.76,2383.25 3829.36,2383.25 3856.75,2410.64 3856.75,2549.36 3815,2591.11 K9.1
  Bottom Layer w30: IC3.8 2315.26,2404 3416.18,2404 3434.08,2386.09 3633.91,2386.09 3636.76,2383.25
NetIC3_11: IC3.11 R2.1 Z1.1 | length 671.7
  Top Layer w20: IC3.11 1935,2398 1991,2454 1991,2599 1940,2650 R2.1
  Top Layer w30: Z1.1 1940,2908.74 R2.1
NetIC3_12: IC3.12 K7.1 | length 390.4
  Bottom Layer w30: IC3.12 1869.74,2323.74 1908.3,2362.3 1972.3,2362.3 K7.1
NetIC3_13: IC3.13 K7.2 | length 390.4
  Bottom Layer w30: IC3.13 1780.13,2368.87 1839.63,2368.87 1924.42,2453.66 1963.66,2453.66 K7.2
NetIC3_14: IC3.14 K7.3 | length 390.4
  Bottom Layer w30: IC3.14 1720.13,2408.87 1818.87,2408.87 K7.3
NetIC3_15: IC3.15 K7.4 | length 390.4
  Bottom Layer w30: IC3.15 1694.26,2483 1793,2483 K7.4
NetIC3_16: IC3.16 K7.5 | length 390.4
  Bottom Layer w30: IC3.16 1641.26,2530 K7.5
NetIC3_19: IC3.19 R5.1 | length 377.2
  Top Layer w30: R5.1 895,2332.4 929.6,2367 1087.24,2367 1130.5,2323.74 IC3.19
NetIC3_20: IC3.20 K8.3 | length 2958.8
  Bottom Layer w30: IC3.20 1095.74,2263 2050,2263 2080,2293 2080,2375 2235,2530 K8.3
NetIC3_21: IC3.21 K8.2 | length 3200
  Bottom Layer w30: IC3.21 1401.74,2083 2078,2083 2195,2200 2195,2387 2252,2444 3810,2444 K8.2
NetIC3_22: IC3.22 K8.1 | length 2929.2
  Bottom Layer w30: IC3.22 1402.24,1983.5 3176.93,1983.5 3186.52,1993.09 3473.09,1993.09 K8.1
NetIC3_23: IC3.23 K12.3 | length 3042.6
  Bottom Layer w20: IC3.23 1338.74,1820 2015,1820 2085,1750 2085,1700 2107.6,1677.4 2211.91,1677.4 2270,1674 2287,1691 2287,1747.28 2298.72,1759 3053.88,1759 3281.38,1531.5 3373.5,1531.5 K12.3
NetIC3_24: IC3.24 K12.2 | length 3162.8
  Top Layer w30: IC3.24 1335,1288 1566,1057 v1(2025,1057)
  Bottom Layer w30: v1(2025,1057) 2118.99,1195.43 2136.57,1213 3592,1213 K12.2
NetIC3_27: IC3.27 K14.1 | length 4962.4
  Bottom Layer w30: IC3.27 1557.74,1639 1028.57,1639 984,1683.57 984,2329.31 1011,2356.31 1011,2561 1056,2606 1056,3176 1200,3320 K14.1
NetIC3_28: IC3.28 K14.4 | length 3594.6
  Top Layer w20: IC3.28 1793,1774.26 v1@1793,2691
  Top Layer w30: v1(1792,2692) v1@1793,2691
  Bottom Layer w30: v1(1792,2692) 1794,2694 2022,2694 2061.27,2733.27 2061.27,2893.27 2272.44,3104.44 3047.52,3104.44 3071.95,3080 3707.49,3080 3743.43,3044.06 3885.49,3044.06 3903.06,3061.64 3903.06,3151.94 K14.4
NetIC3_30: IC3.30 K14.5 | length 3555.4
  Top Layer w20: v1@1886.75,2628.75 1886.75,1766.2 IC3.30@1935,1717.95
  Top Layer w30: v1@1886.75,2628.75 v1(1889,2631) ; IC3.30 IC3.30@1935,1717.95
  Bottom Layer w30: v1(1889,2631) 1708.43,2631 1662,2677.43 1662,2843 1963.44,3144.44 3268.85,3144.44 3293.28,3120 K14.5
NetIC3_33: IC3.33 K10.1 | length 1668.2
  Bottom Layer w20: IC3.33 2235,1764.53 2283.47,1813 3733,1813 K10.1
NetIC3_34: IC3.34 K10.2 | length 1656.1
  Top Layer w30: IC3.34 2335,1844 v1(2388,1897)
  Bottom Layer w30: v1(2388,1897) 3588.6,1897 3676.6,1985 K10.2
NetIC3_35: IC3.35 K4.2 R21.2 | length 3948.1
  Top Layer w30: v1(2172,1635) 2353.74,1635 IC3.35 2435,2146 2483.73,2194.73 2543.73,2194.73 v1(2595,2246) ; v1(3127,2358) 3127,2361.6 3134.6,2369.2 R21.2
  Bottom Layer w30: K4.2 1273.78,620 1570.57,698 1753,880.43 1781.48,1032.17 1782,1034.91 1782,1065.08 1782,1077.51 1773.21,1086.29 1764.43,1095.08 1742.23,1095.08 1674.9,1046.01 cw(c1657.2,1070.24) 1674.84,1045.96 1667.01,1040.26 1657.13,1040.24 1644.81,1040.26 1636.05,1048.96 cw(c1657.2,1070.24) 1635.93,1049.09 1627.23,1057.83 1627.2,1060.47 1627.2,1070.24 1627.2,1226.2 2036,1635 v1(2172,1635) ; v1(2595,2246) 2664.39,2246 2703.39,2285 2769.18,2285 2809,2245.18 3051.18,2245.18 3097,2291 3097,2324.4 3127,2354.4 v1(3127,2358)
NetIC3_36: IC3.36 K4.3 R23.2 | length 4192.7
  Top Layer w30: IC3.36 2535,2017 v1(2632.56,2114.56) ; R23.2@3449,2264.91 3449,2288.87 3503.67,2343.55 3510.45,2343.55 v1(3513,2346.09)
  Bottom Layer w30: K4.3 1249.78,520 1587.14,658 1793,863.86 1804.48,925.04 1822,1018.34 1822,1097.1 1804.43,1114.67 1780.99,1135.08 1729.2,1135.08 1720.64,1131.79 1693.56,1131.79 1687.23,1135.9 1684.99,1138.14 1675.99,1147.14 1675.99,1171.99 2095,1591 2208,1591 2256,1639 2457.74,1639 IC3.36 ; v1(2632.56,2114.56) 3388.84,2114.56 3513,2238.72 v1(3513,2346.09)
NetK2_1: K2.1 R1.2 R1.4 | length 936.5
  Top Layer w30: R1.2 452,2978.79 452,3199.64 R1.4 635,3382.64 K2.1
NetK3_1: K3.1 L1.2 | length 431.1
  Top Layer w30: L1.2 3090,575 K3.1
NetK3_2: K3.2 L1.3 | length 410.4
  Top Layer w30: K3.2 3290,450 3315,475 L1.3
NetK6_2: K6.2 R14.1 R20.2 R22.1 R25.1 | length 4501.1
  Top Layer w30: R22.1 3214.4,2193.2 3267.91,2139.69 3267.91,1820.09 v1@3310,1778 ; v1(3302,1770) v1@3310,1778 ; R20.2 3432.4,1788 3320,1788 v1@3310,1778 ; R14.1 3432.4,2411 3657.8,2411 ; R25.1 3657.8,2411 ; v1(3892,812) 3892,1194.08 3913,1215.08 3913,1797.34 3877,1833.34 3877,1934.32 3891.75,1949.07 3891.75,2120.93 3844,2168.68 3844,2197.35 3749,2292.35 3749,2350 3701.54,2397.46 3671.34,2397.46 3657.8,2411
  Bottom Layer w20: v1(3302,1770) 3302,1681.36 3371.86,1611.5 3685.5,1611.5 3700,1597 3825,1597 3902,1520 3902,828.31 3892,818.31 v1(3892,812) K6.2
NetL1_1: L1.1 Q4.3 | length 944.7
  Bottom Layer w30: Q4.3 2648,1168 2954.43,1168 2973.07,1149.36 2973.07,791.93 L1.1
NetQ1_2: Q1.2 R4.2 R5.2 | length 2505.2
  Top Layer w30: R5.2 790.46,2257.14 840.43,2257.14 858,2239.57 858,1726 781,1649 781,1185.53 Q1.2 957.4,1220 1298,1220 1547,971 1547,577.4 R4.2
NetQ2_2: Q2.2 Q3.1 Q5.2 R6.1 | length 1499.2
  Top Layer w30: Q2.2 3091.93,1143.46 ; Q3.1 3091.93,1143.46 ; R6.1 3135.87,1187.4 3091.93,1143.46
  Bottom Layer w30: Q5.2 2541,1329 3032.9,1329 Q3.1
NetQ2_3: Q2.3 Q5.1 R7.1 | length 1355.7
  Top Layer w20: v1(2820,1505) 2857,1505 2934,1428 2934,1193 2973.07,1153.93 2973.07,1032 2973.24,1029.4 ; 2990.64,1012 3062.83,1012 Q2.3
  Top Layer w30: Q5.1 2467.36,1342.44 2500,1309.8 R7.1 ; 2973.24,1029.4 2981.86,1020.79 2990.64,1012
  Bottom Layer w30: Q5.1 v1(2820,1505)
NetQ4_1: Q4.1 R7.2 | length 319.9
  Top Layer w30: Q4.1 2515,1235 R7.2
NetR17_1: R17.1 R19.1 | length 1135.6
  Top Layer w30: v1(3056.51,2023.5) 3056.51,1798.09 3177.6,1677 R19.1 ; R17.1 3574.6,2168.1 v1(3579.5,2173)
  Bottom Layer w30: v1(3056.51,2023.5) 3160.36,2023.5 3169.96,2033.09 3439.59,2033.09 v1(3579.5,2173)
VCC: C3.1 Q2.1 Q4.2 R2.2 R6.2 | length 4548.5
  Top Layer w40: 1584,1609 1584,2465
  Top Layer w50: C3.1 1450,2948.7 1450,2780.71 1584,2646.71 ; 1584,1609 2119,1074 2119,894.29 2148.29,865 2380.71,865 2410,894.29 Q4.2 ; 1584,2465 1584,2646.71 ; R2.2 1707.29,2770 1584,2646.71 ; Q2.1 2923.07,973.07 2952.36,943.78 3312.73,943.78 3409.85,1040.9 R6.2@3409.85,1107.28
  Bottom Layer w50: Q4.2 2414.9,1025.1 2414.9,1004.1 2501,918 2764.1,918 Q2.1
pads on no net: BR2.1 ENC1.3 ENC1.4 IC3.3 IC3.4 IC3.25 IC3.26 IC3.40 R1.7 R3.2

## Polygon pours and split planes (outlines as drawn)
GND on Top Layer "GND_L01_P000" (solid, pour order 0): 3759,3671 430,3829 246,3645 273,273 1267,238 1281,224 3733,224 3733,229 3944.19,440.19
GND on Bottom Layer "GND_L02_P002" (solid, pour order 2): 338,3852 3549,3852 3888,3513 3888,389 3590,91 518,91 115,494 221,600 221,3495 303,3664

## Text inside footprints (layer, text, board x,y; h text height)
K4: Bottom Overlay "4" at 740,435 h40 r90; Bottom Overlay "1" at 740,725 h40 r90
K7: Top Overlay "5" at 1755,2460 h40 r180; Top Overlay "1" at 2140,2455 h40 r180
K14: Top Overlay "5" at 3710,3045 h40 r270; Top Overlay "6" at 3850,3045 h40 r270; Top Overlay "1" at 3715,3410 h40 r270; Top Overlay "2" at 3820,3420 h40 r270